# EAGLE board Andranik_Lab2_Board (EAGLE 7.2.0)
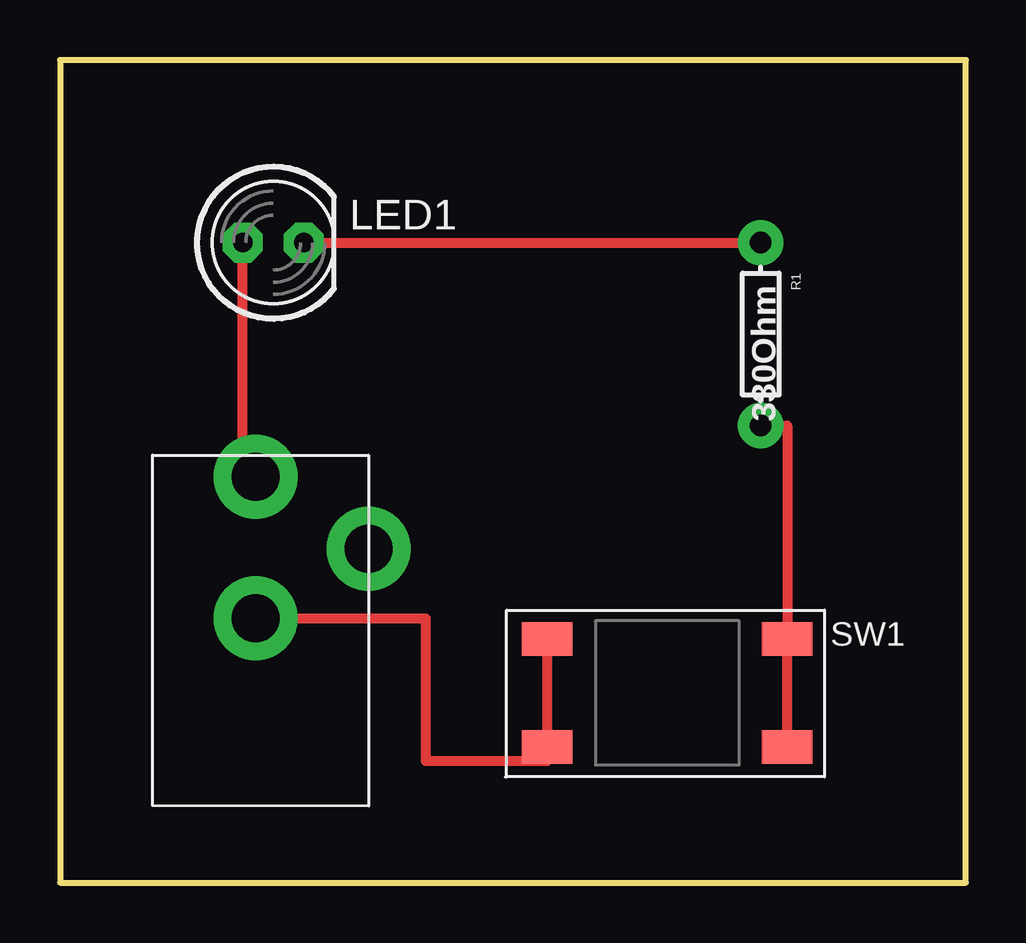
[diagram p0: board, top side]

Size 37.77 x 34.28 mm. Coordinates in mm from the lower left corner, seen from the top.
Outline: 0,0 37.77,0 37.77,34.28 0,34.28 0,0
Copper layers (1*16): Top 0.035mm / dielectric 1.5mm / Bottom 0.035mm
Design rules "default": minimum track width 10mil, minimum drill 0.6mm, track to track 8mil, track to pad 8mil, pad to pad 8mil, via to via 8mil, smd to smd 8mil, copper to edge 40mil, drill to drill 8mil, minimum pad ring 10mil, minimum via ring 8mil, stop-mask expansion 4mil, vias tented up to drill 0mil, thermal gap 10mil

## Footprints (pad centres in the part's own frame; a part is rotated, then mirrored left to right if it is on the bottom)
PJ-102A = drill 2 pad 3.5: RING -6.77,-4.345; RING_SW -3.87,-9.045; TIP -0.87,-4.345
LED5MM = drill 0.813 pad 1.676 octagon: A -1.27,0; K 1.27,0
AXIAL-0.3 = drill 0.9 pad 1.88: P$1 -3.81,0; P$2 3.81,0
BUTTON-TACTILE-SQUARE = smd 2.1 x 1.4: 1 0,0; 2 0,-4.5; 3 10,0; 4 10,-4.5

## Placement (x,y rotation side)
J1  2.1MMJACKTHM  [PJ-102A]  3.81,17.78 90 top
LED1  Yellow  [LED5MM]  8.89,26.67 0 top
R1  330Ohm  [AXIAL-0.3]  29.21,22.86 270 top
SW1  [BUTTON-TACTILE-SQUARE]  20.32,10.16 0 top

## Library data of the parts
J1 LED1 R1 = Lab2
SW1 = Andranik - Lab2 

## Nets
N$1: J1.TIP LED1.A
N$2: LED1.K R1.P$1
N$3: R1.P$2 SW1.3 SW1.4
N$4: J1.RING SW1.1 SW1.2

## Tracks (layer width: path | path; a pad name or v marks a point on that pad's centre or on a via)
N$1
  Top 0.406: J1.TIP 7.62,16.91 LED1.A
N$2
  Top 0.406: LED1.K R1.P$1
N$3
  Top 0.406: R1.P$2 30.32,19.05 SW1.3 SW1.4
N$4
  Top 0.406: SW1.1 20.32,6.35 SW1.2 20.32,5.08 15.24,5.08 15.24,11.01 J1.RING